# Altium PCB PCB2.PcbDoc
Units mm, origin at the board's own origin, x right, y up, seen from the top; angles counter-clockwise.
Board outline 14 x 14.04 mm, 2 copper layers (Top Layer, Bottom Layer); 20 components, 20 nets, 79 pads, 13 vias.
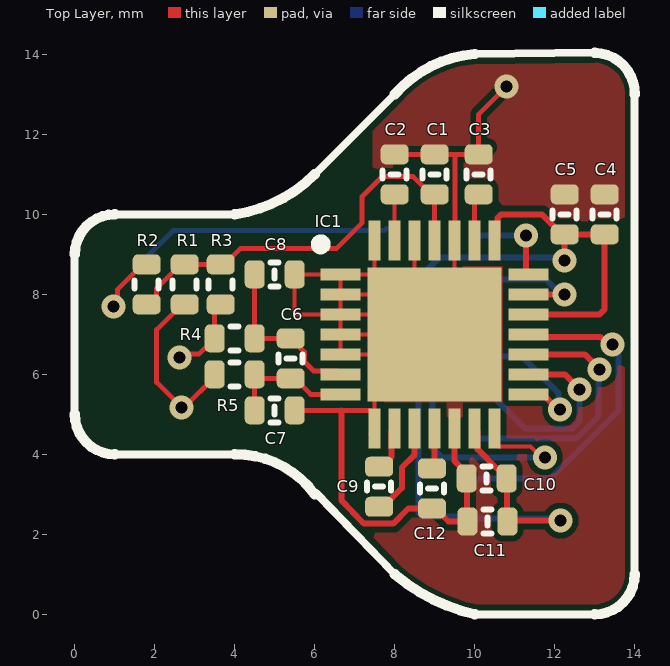
[diagram p0: Top Layer view]
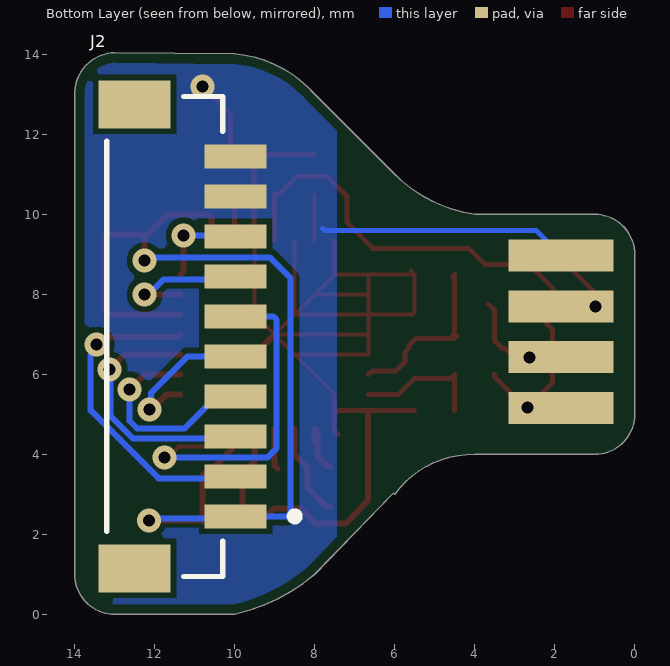
[diagram p1: Bottom Layer view, seen from below]

## Layer stack, top to bottom
Top Solder: solder mask 0.0102, Solder Resist, Dk 3.5
Top Layer: signal copper 0.0356
Dielectric 1: dielectric 0.32, FR-4, Dk 4.8
Bottom Layer: signal copper 0.0356
Bottom Solder: solder mask 0.0102, Solder Resist, Dk 3.5

## Board outline
1,4 cw(c1,5) 0,5 0,9 cw(c1,9) 1,10 4,10 ccw(c3.5,13.5) 6,11 8,13 cw(c10.241,11.047) 10,14.01 13,14.04 cw(c12.98,13.02) 14,13 14,1 cw(c13,1) 13,0 10,0 cw(c11.05,4.6) 8,1 6.034,3.033 6,3 ccw(c4.033,1.567) 4,4

## Design rules (kind name [scope] priority, off if disabled: settings)
AcuteAngle [All] p1: minimum=3.50000000000000E+0001 checktracksonly=FALSE
BoardOutlineClearance "BoardOutlineClearance 1" [All] p1: gap=0.25 ignorepadtopadclearanceinfootprint=FALSE except(0: Arc-SplitContinuation Track-SplitContinuation SMDPad-SplitContinuation THPad-SplitContinuation Via-SplitContinuation Fill-SplitContinuation Poly-SplitContinuation Region-SplitContinuation Text-SplitContinuation) // Milling
BoardOutlineClearance "BoardOutlineClearance 2" [All] p2: gap=0.4 ignorepadtopadclearanceinfootprint=FALSE except(0: Arc-SplitContinuation Track-SplitContinuation SMDPad-SplitContinuation THPad-SplitContinuation Via-SplitContinuation Fill-SplitContinuation Poly-SplitContinuation Region-SplitContinuation Text-SplitContinuation) // V-Cut
Clearance "Clearance-2 1/2 Oz" [All] p1: gap=0.1 ignorepadtopadclearanceinfootprint=FALSE except(0.15: Arc-Fill Arc-Poly Track-Fill Track-Poly SMDPad-SMDPad SMDPad-Fill SMDPad-Poly THPad-Fill THPad-Poly Via-Fill Via-Poly Fill-Fill Fill-Poly Poly-Poly Poly-Region Poly-Text; 0.25: Arc-Hole Track-Hole SMDPad-Hole THPad-Hole Via-Hole Fill-Hole Poly-Hole Region-Hole Text-Hole) // Advance
Clearance "Clearance-1 1/2 Oz" [All] p2: gap=0.125 ignorepadtopadclearanceinfootprint=FALSE except(0.2: Arc-Fill Arc-Poly Track-Fill Track-Poly SMDPad-SMDPad SMDPad-Fill SMDPad-Poly THPad-Fill THPad-Poly Via-Fill Via-Poly Fill-Fill Fill-Poly Poly-Poly Poly-Region Poly-Text; 0.25: Arc-Hole Track-Hole SMDPad-Hole THPad-Hole Via-Hole Fill-Hole Poly-Hole Region-Hole Text-Hole) // Standart
Clearance "Clearance 3 Oz" [All] p3: gap=0.35 ignorepadtopadclearanceinfootprint=FALSE except(0.25: Arc-Hole Track-Hole SMDPad-Hole THPad-Hole Via-Hole Fill-Hole Poly-Hole Region-Hole Text-Hole)
Clearance "Clearance 2 Oz" [All] p4: gap=0.3 ignorepadtopadclearanceinfootprint=FALSE except(0.25: Arc-Hole Track-Hole SMDPad-Hole THPad-Hole Via-Hole Fill-Hole Poly-Hole Region-Hole Text-Hole)
Clearance "Clearance-1 1 Oz" [All] p5: gap=0.2 ignorepadtopadclearanceinfootprint=FALSE except(0.25: Arc-Hole Track-Hole SMDPad-Hole THPad-Hole Via-Hole Fill-Hole Poly-Hole Region-Hole Text-Hole) // Standart
Clearance "Clearance-2 1 Oz" [All] p6: gap=0.15 ignorepadtopadclearanceinfootprint=FALSE except(0.2: Arc-Fill Arc-Poly Track-Fill Track-Poly SMDPad-Fill SMDPad-Poly THPad-Fill THPad-Poly Via-Fill Via-Poly Fill-Fill Fill-Poly Poly-Poly; 0.25: Arc-Hole Track-Hole SMDPad-Hole THPad-Hole Via-Hole Fill-Hole Poly-Hole Region-Hole Text-Hole) // Advance
ComponentClearance [All] p1: gap=0.15 collisioncheckmode=3 verticalgap=0.254 showdistances=FALSE
DiffPairsRouting "DiffPairsRouting 1 Oz" [All] p1: maxlimit=0.254 minlimit=0.2 mostfreqgap=0.254 toplayer_minwidth=0.1 toplayer_maxwidth=0.381 toplayer_prefwidth=0.381 bottomlayer_minwidth=0.1 bottomlayer_maxwidth=0.381 bottomlayer_prefwidth=0.381 maxuncoupledlength=12.7
DiffPairsRouting "DiffPairsRouting 1/2 Oz" [All] p2: maxlimit=0.254 minlimit=0.1 mostfreqgap=0.254 toplayer_minwidth=0.1 toplayer_maxwidth=0.381 toplayer_prefwidth=0.381 bottomlayer_minwidth=0.1 bottomlayer_maxwidth=0.381 bottomlayer_prefwidth=0.381 maxuncoupledlength=12.7
HoleSize "Minimum HoleSize" [IsPad] p1: absolutevalues=TRUE maxlimit=5.9 minlimit=0.6 maxpercent=80.000 minpercent=20.000
HoleSize "Minimum HoleSize VIA 1" [IsVia] p2: absolutevalues=TRUE maxlimit=5.9 minlimit=0.3 maxpercent=80.000 minpercent=20.000 // Standart
HoleSize "Minimum HoleSize VIA 2" [IsVia] p3: absolutevalues=TRUE maxlimit=5.9 minlimit=0.2 maxpercent=80.000 minpercent=20.000 // Advance
HoleToHoleClearance Hole2HoleClearance [All] p1: gap=0.25 allowstackedmicrovias=FALSE
MinimumAnnularRing "Minimum AR VIA Standart" [IsVia] p1: minimumring=0.15
MinimumAnnularRing "Minimum AR PAD Standart" [IsPAD] p2: minimumring=0.2
MinimumAnnularRing "Minimum AR VIA Advance" [IsVia] p3: minimumring=0.1
MinimumAnnularRing "Minimum AR PAD Advance" [IsPAD] p4: minimumring=0.15
MinimumSolderMaskSliver "SolderMask Bridge Standart" [All] p1: minsoldermaskwidth=0.15 // All Masks
MinimumSolderMaskSliver "SolderMask Bridge Advance" [All] p2: minsoldermaskwidth=0.1 // Mask LDI
PlaneClearance "PlaneClearance 3 Oz" [All] p1: clearance=0.35
PlaneClearance "PlaneClearance 2 Oz" [All] p2: clearance=0.3
PlaneClearance "PlaneClearance 1 Oz" [All] p3: clearance=0.2
PlaneClearance "PlaneClearance-1 1/2 Oz" [All] p4: clearance=0.2 // Standart
PlaneClearance "PlaneClearance-2 1/2 Oz" [All] p5: clearance=0.15 // Advance
PlaneConnect "TermalConnect-1 1 Oz" [All] p1: planeconnectstyle=Direct reliefexpansion=0.2 reliefentries=4 reliefconductorwidth=0.2 reliefairgap=0.2 // Standart
PlaneConnect "TermalConnect-2 1/2 Oz" [All] p2: planeconnectstyle=Direct reliefexpansion=0.15 reliefentries=4 reliefconductorwidth=0.15 reliefairgap=0.15 // Advance
PlaneConnect "TermalConnect 3 Oz" [All] p3: planeconnectstyle=Relief reliefexpansion=0.2 reliefentries=4 reliefconductorwidth=0.35 reliefairgap=0.35 // Standart
PlaneConnect "TermalConnect 2 Oz" [All] p4: planeconnectstyle=Relief reliefexpansion=0.2 reliefentries=4 reliefconductorwidth=0.3 reliefairgap=0.3 // Standart
PlaneConnect "TermalConnect-2 1 Oz" [All] p5: pad.planeconnectstyle=Relief pad.reliefexpansion=0.15 pad.reliefentries=4 pad.reliefconductorwidth=0.2 pad.reliefairgap=0.2 via.planeconnectstyle=Direct via.reliefexpansion=0.15 via.reliefentries=4 via.reliefconductorwidth=0.15 via.reliefairgap=0.15 // Advance
PlaneConnect "TermalConnect-1 1/2 Oz" [All] p6: planeconnectstyle=Relief reliefexpansion=0.2 reliefentries=4 reliefconductorwidth=0.2 reliefairgap=0.2 // Standart
PolygonConnect "PolygonConnect 3 Oz" [All] p1: connectstyle=Direct reliefconductorwidth=0.35 reliefentries=4 polygonreliefangle="90 Angle" airgapwidth=0.35
PolygonConnect "PolygonConnect 2 Oz" [All] p2: thpad.connectstyle=Relief thpad.reliefconductorwidth=0.3 thpad.reliefentries=4 thpad.polygonreliefangle="90 Angle" thpad.airgapwidth=0.3 smdpad.connectstyle=Relief smdpad.reliefconductorwidth=0.3 smdpad.reliefentries=4 smdpad.polygonreliefangle="90 Angle" smdpad.airgapwidth=0.3 via.connectstyle=Direct via.reliefconductorwidth=0.254 via.reliefentries=4 via.polygonreliefangle="90 Angle" via.airgapwidth=0.254
PolygonConnect "PolygonConnect-1 1 Oz" [All] p3: thpad.connectstyle=Relief thpad.reliefconductorwidth=0.2 thpad.reliefentries=4 thpad.polygonreliefangle="90 Angle" thpad.airgapwidth=0.2 smdpad.connectstyle=Relief smdpad.reliefconductorwidth=0.2 smdpad.reliefentries=4 smdpad.polygonreliefangle="90 Angle" smdpad.airgapwidth=0.2 via.connectstyle=Direct via.reliefconductorwidth=0.254 via.reliefentries=4 via.polygonreliefangle="90 Angle" via.airgapwidth=0.254 // Standart
PolygonConnect "PolygonConnect-2 1 Oz" [All] p4: thpad.connectstyle=Relief thpad.reliefconductorwidth=0.15 thpad.reliefentries=4 thpad.polygonreliefangle="90 Angle" thpad.airgapwidth=0.15 smdpad.connectstyle=Relief smdpad.reliefconductorwidth=0.15 smdpad.reliefentries=4 smdpad.polygonreliefangle="90 Angle" smdpad.airgapwidth=0.15 via.connectstyle=Direct via.reliefconductorwidth=0.254 via.reliefentries=4 via.polygonreliefangle="90 Angle" via.airgapwidth=0.254 // Advance
PolygonConnect "PolygonConnect-1 1/2 Oz" [All] p5: thpad.connectstyle=Relief thpad.reliefconductorwidth=0.15 thpad.reliefentries=4 thpad.polygonreliefangle="90 Angle" thpad.airgapwidth=0.2 smdpad.connectstyle=Relief smdpad.reliefconductorwidth=0.2 smdpad.reliefentries=4 smdpad.polygonreliefangle="90 Angle" smdpad.airgapwidth=0.2 via.connectstyle=Direct via.reliefconductorwidth=0.254 via.reliefentries=4 via.polygonreliefangle="90 Angle" via.airgapwidth=0.254 // Standart
PolygonConnect "PolygonConnect-2 1/2 Oz" [All] p6: thpad.connectstyle=Relief thpad.reliefconductorwidth=0.125 thpad.reliefentries=4 thpad.polygonreliefangle="90 Angle" thpad.airgapwidth=0.15 smdpad.connectstyle=Relief smdpad.reliefconductorwidth=0.125 smdpad.reliefentries=4 smdpad.polygonreliefangle="90 Angle" smdpad.airgapwidth=0.15 via.connectstyle=Direct via.reliefconductorwidth=0.254 via.reliefentries=4 via.polygonreliefangle="90 Angle" via.airgapwidth=0.254 // Advance
RoutingCorners [All] p1 off: cornerstyle=45-Degree minsetback=2.54 maxsetback=2.54
RoutingVias [All] p1: holewidth=0.3 width=0.6 viastyle="Through Hole" minholewidth=0.2 minwidth=0.4 maxholewidth=5.9 maxwidth=6.4
SilkToSilkClearance Silk2SilkClearance [All] p1 off: silktosilkclearance=0.15
SilkToSolderMaskClearance Silk2SolderMaskClearance [IsPad] p1 off: minsilkscreentomaskgap=0.15 clearancetoexposedcopper=TRUE
SolderMaskExpansion SolderMaskExpansion-1 [All] p1: expansion=0.05 istentingtop=FALSE // Standart
SolderMaskExpansion "SolderMaskExpansion LDI" [All] p2: expansion=0.025 istentingtop=FALSE // Advance
UnRoutedNet [All] p1: checkbadconnections=TRUE
Width "Width 1/2 Oz" [All] p1: maxlimit=10 minlimit=0.1 preferedwidth=0.125 checkconnectedcopper=TRUE
Width "Width 3 Oz" [All] p2: maxlimit=10 minlimit=0.35 preferedwidth=0.4 checkconnectedcopper=TRUE
Width "Width 2 Oz" [All] p3: maxlimit=10 minlimit=0.3 preferedwidth=0.35 minimp=50.000000 maximp=50.000000 favimp=50.000000 checkconnectedcopper=TRUE
Width "Width 1 Oz" [All] p4: maxlimit=10 minlimit=0.15 preferedwidth=0.2 checkconnectedcopper=TRUE
19 further rules are at their usual default settings.

## Components (designator, comment, footprint, x,y, rotation, side; value= is the part's Value field where it differs from the comment)
C1 "10мкФ" C0402C 9,11 r90 top value=0,01
C2 "1мкФ" C0402C 8,11 r90 top value=0,01
C3 "10мкФ" C0402C 10.1,11 r90 top value=0,01
C4 "10мкФ" C0402C 13.25,10 r90 top value=0,01
C5 "100нФ" C0402C 12.25,10 r90 top value=0,01
C6 "1нФ" C0402C 5.4,6.4 r270 top value=0,01
C7 "10пФ" C0402C 5,5.1 r180 top value=0,01
C8 "10пФ" C0402C 5,8.5 r180 top value=0,01
C9 "1мкФ" C0402C 7.61,3.19 r90 top value=0,01
C10 "10мкФ" C0402C 10.3,3.4 r180 top value=0,01
C11 "100нФ" C0402C 10.32,2.32 r180 top value=0,01
C12 "1нФ" C0402C 8.93,3.15 r270 top value=0,01
IC1 "MAX30003CTI+" QFN50P500X500X80-29N 9,7 r0 top locked
J1 "M50-3600342" HARWIN_M50-3600342 -0.1,7.7 r270 bottom
J2 "BM10B-SRSS-TB(LF)(SN)" JST_BM10B-SRSS-TB(LF)(SN) 12.5,6.95 r90 bottom locked
R1 "500к" C0402R 2.75,8.25 r270 top value=0R
R2 "0R" C0402R 1.8,8.25 r270 top
R3 "500к" C0402R 3.65,8.25 r270 top value=0R
R4 "1к" C0402R 4,6.9 r180 top value=0R
R5 "1к" C0402R 4,6 r180 top value=0R

## Footprints (in the part's own frame and the unit in brackets; to place one, negate y for a bottom-side part, rotate by r counter-clockwise, add the part's x,y. Pads: shape width x height; smd on the part's side, far side on the other; paste and mask are expansions set on the pad)
C0402C [mm]
  rrect50% 0.5x0.7 smd: 1(-0.5,0) 2(0.5,0)
  silkscreen extent -0.1,-0.3 0.1,0.3, body extent -0.5,-0.28 0.5,0.28, height 0.5
C0402R [mm]
  rrect50% 0.5x0.7 smd: 1(-0.5,0) 2(0.5,0)
  silkscreen extent -0.1,-0.3 0.1,0.3, body extent -0.5,-0.28 0.5,0.28, height 0.5
HARWIN_M50-3600342 [mm]
  rect 0.8x2.62 smd: 1(-1.27,-1.94) 2(0,-1.94) 3(1.27,-1.94) 4(2.54,-1.94)
JST_BM10B-SRSS-TB(LF)(SN) [mm]
  rect 0.6x1.55 smd: 1(-4.5,-2.525) 2(-3.5,-2.525) 3(-2.5,-2.525) 4(-1.5,-2.525) 5(-0.5,-2.525) 6(0.5,-2.525) 7(1.5,-2.525) 8(2.5,-2.525) 9(3.5,-2.525) 10(4.5,-2.525)
  rect 1.2x1.8 smd: S1(-5.8,0) S2(5.8,0)
  silkscreen extent -6,-4.1 6,0.7
QFN50P500X500X80-29N [mm]
  rect 1x0.3 smd: 1(-2.35,1.5) 2(-2.35,1) 3(-2.35,0.5) 4(-2.35,0) 5(-2.35,-0.5) 6(-2.35,-1) 7(-2.35,-1.5) 15(2.35,-1.5) 16(2.35,-1) 17(2.35,-0.5) 18(2.35,0) 19(2.35,0.5) 20(2.35,1) 21(2.35,1.5)
  rect 0.3x1 smd: 8(-1.5,-2.35) 9(-1,-2.35) 10(-0.5,-2.35) 11(0,-2.35) 12(0.5,-2.35) 13(1,-2.35) 14(1.5,-2.35) 22(1.5,2.35) 23(1,2.35) 24(0.5,2.35) 25(0,2.35) 26(-0.5,2.35) 27(-1,2.35) 28(-1.5,2.35)
  rect 3.35x3.35 smd: 29(0,0)
  silkscreen extent -2.97,2.13 -2.72,2.37, body extent -2.55,-2.55 2.55,2.55, height 0.8

## Part data
C1 C2 C3 C4 C5 C6 C7 C8 C9 C10 C11 C12: library part CC0402JRX7R9BB103, "CC0402JRX7R9BB103, 0402 X5R 0,01 uF 50V", Dielectric=X5R, Manufacturer=Yageo, Package="SMD 0402", Tolerance=±10%, Voltage=50V, Component Note="0402 0,01uF ±10% 50V X5R", ComponentLink1Description=Datasheet, Part Number=CC0402JRX7R9BB103, Tmax=125, Tmin=-55, Units=uF
IC1: "Integrated Circuit", Manufacturer_Name="Analog Devices", Mouser Part Number=700-MAX30003CTI+, Arrow Part Number=MAX30003CTI+, Arrow Price/Stock=https://www.arrow.com/en/products/max30003cti/maxim-integrated?region=nac, Datasheet Link=https://datasheets.maximintegrated.com/en/ds/MAX30003.pdf, Height=0.8mm, Manufacturer_Part_Number=MAX30003CTI+, Mouser Price/Stock=https://www.mouser.co.uk/ProductDetail/Analog-Devices-Maxim-Integrated/MAX30003CTI%2b?qs=rUyhvjvpWj%2FiU0gYUPHOFw%3D%3D
J1: Package=None, Availability=Unavailable, MP=M50-3600342, Price=None
J2: "Connector Header Surface Mount 10 position 0.039 (1.00mm)", Package=None, Availability="In Stock", Check_prices=https://www.snapeda.com/parts/BM10B-SRSS-TB(LF)(SN)/JST+Sales+America+Inc./view-part/?ref=eda, MF="JST Sales", MP=BM10B-SRSS-TB(LF)(SN), Price=None, SnapEDA_Link=https://www.snapeda.com/parts/BM10B-SRSS-TB(LF)(SN)/JST+Sales+America+Inc./view-part/?ref=snap
R1 R2 R3 R4 R5: library part Р1-12М-0402-0, "Р1-12М-0402-0,  SMD 0402", Manufacturer="НПО ЭРКОН", Package="SMD 0402", Component Note="0402 0R", Part Number=Р1-12М-0402-0, TU="АБШК.434110.023 ТУ", TYPE=Р1-12М

## Via types
v1: diameter 0.6, hole 0.3, Top Layer to Bottom Layer, tented both sides, 13 vias

## Nets (pads, with @x,y where several pads share a name; then routed paths per layer and width w, separated by ;. In a path a pad name is that pad's centre, name@x,y a point inside that pad or via, vN(x,y) a via of type N, cw(c..) or ccw(c..) an arc to the next point about the centre after c; other vN are vias at no path point)
1.8V: C4.1 C5.1 C10.1 C11.1 IC1.13 IC1.19 IC1.22 J2.1 | length 25.4
  Top Layer w0.15: IC1.13 10.075,4.575 10.075,4.125 10.556,3.644 10.629,3.644 10.8,3.473 C10.1 10.81,3.39 10.81,2.33 C11.1 10.845,2.345 v1(12.145,2.345) ; IC1.22 10.575,9.425 10.575,9.912 10.663,10 11.677,10 12.177,9.5 C5.1 ; IC1.19 13.125,7.5 13.25,7.625 C4.1 C5.1 ; v1(12.25,8.85) C5.1
  Bottom Layer w0.15: v1(12.145,2.345) 12.09,2.4 10.025,2.4 J2.1 8.688,2.45 8.6,2.538 8.6,8.397 9.128,8.925 12.175,8.925 v1(12.25,8.85)
AGND: C1.2 C2.2 C3.2 C4.2 C5.2 C7.1 C8.1 C10.2 C11.2 C12.2 IC1.1 IC1.2 IC1.3 IC1.4 IC1.5 IC1.8 IC1.12 IC1.24 IC1.26 IC1.28 IC1.29 J1.1 J2.9 J2.10 | length 48.7
  Top Layer w0.1: C8.1@5.591,8.591 C8.1 ; IC1.3@6.616,7.466 IC1.3 ; IC1.8 7.5,5 7.5,5.5 IC1.29@8.5,6.5 ; IC1.28 IC1.29@7.5,8.5 ; IC1.26 IC1.29@8.5,7.5 ; IC1.24 9.5,7.5 IC1.29 ; C11.2@9.695,2.445 9.81,2.33 C11.2 ; C8.1 5.5,7.559 5.559,7.5 IC1.3 ; C8.1 IC1.1 ; IC1.4 IC1.3 ; IC1.4 IC1.29 ; IC1.4 IC1.5 IC1.29@8.5,6.5 ; IC1.3 IC1.29@8.5,7.5 ; IC1.3 IC1.2 ; IC1.2 IC1.29@8,8 ; IC1.2 IC1.1 ; IC1.1 IC1.29@7.5,8.5 ; IC1.29@7.5,8.5 IC1.29@8,8 ; IC1.29@8,8 IC1.29@8.5,7.5 ; IC1.29@8.5,6.5 IC1.29 ; IC1.29@8.5,7.5 IC1.29
  Top Layer w0.125: C7.1 6.67,5.1 7.4,5.1 IC1.8@7.5,5 ; IC1.8@7.413,4.5 7.5,4.587 IC1.8 ; C2.2 C1.2 9.513,11.5 ; IC1.24 9.513,9.363 9.513,11.5 ; C11.2@9.695,2.445 9.81,2.33 C11.2 ; C3.2@10.349,11.683 10.166,11.5 C3.2 ; v1(10.8,13.2) 10.1,12.5 C3.2 ; 9.513,11.5 C3.2
  Top Layer w0.15: 6.67,5.1 6.67,2.843 7.185,2.31 ; 7.186,2.309 7.23,2.265 7.959,2.265 8.344,2.65 C12.2 9.015,2.65 9.345,2.32 C11.2 ; IC1.29 IC1.29@9.5,6.5 ; IC1.12@9.438,4.588 IC1.12 9.5,3.827 9.862,3.465 9.862,3.463 C10.2 9.81,3.39 C11.2@9.81,2.33
  Bottom Layer w0.1: J2.10 J2.10@10.025,11.5
  Bottom Layer w0.125: J1.1 2.47,9.6 7.75,9.6 7.8,9.65
CLK: IC1.16 J2.4 | length 5.3
  Top Layer w0.15: IC1.16 12.25,6 v1(12.625,5.625)
  Bottom Layer w0.15: J2.4 10.45,5.45 11.25,4.65 12.443,4.65 12.625,4.832 v1(12.625,5.625)
CS: IC1.15 J2.5 | length 3.9
  Top Layer w0.15: IC1.15 11.7,5.5 12.075,5.125 v1(12.135,5.125)
  Bottom Layer w0.15: J2.5 11.175,6.45 12.096,5.529 12.096,5.164 v1(12.135,5.125)
FCLK: IC1.14 J2.6 | length 8.9
  Top Layer w0.1: IC1.14 10.5,4.3 10.6,4.2 11.392,4.2 11.667,3.925 v1(11.753,3.925)
  Bottom Layer w0.15: J2.6 9.038,7.45 8.95,7.362 8.95,4.153 9.178,3.925 v1(11.753,3.925)
INT2B: IC1.20 J2.7 | length 3.4
  Top Layer w0.15: IC1.20 v1(12.25,8)
  Bottom Layer w0.15: J2.7@10.025,8.5 J2.7 10.05,8.375 11.776,8.375 12.151,8 v1(12.25,8)
INTB: IC1.21 J2.8 | length 2.3
  Top Layer w0.15: v1(11.277,9.473) 11.277,8.573 IC1.21
  Bottom Layer w0.15: J2.8 9.998,9.473 v1(11.277,9.473)
MISO: IC1.18 J2.2 | length 8.3
  Top Layer w0.15: IC1.18 11.413,6.938 13.137,6.938 13.33,6.745 v1(13.45,6.745)
  Bottom Layer w0.15: J2.2 10.025,3.4 11.9,3.4 13.6,5.1 13.6,6.473 13.45,6.623 v1(13.45,6.745)
MOSI: IC1.17 J2.3 | length 6.5
  Top Layer w0.15: IC1.17 12.746,6.5 13.121,6.125 v1(13.125,6.125)
  Bottom Layer w0.15: J2.3 10.025,4.4 12.546,4.4 13.1,4.954 13.1,6.1 v1(13.125,6.125)
N: J1.4 R1.2 R5.2 | length 4.4
  Top Layer w0.125: R1.2 2.684,7.75 2.05,7.116 2.05,5.8 v1(2.675,5.175) 2.741,5.175 3.5,5.934 R5.2
NetC2_1: C2.1 IC1.27 | length 1.2
  Top Layer w0.1: IC1.27 C2.1
NetC3_1: C3.1 IC1.23 | length 1.2
  Top Layer w0.125: IC1.23 10,10.4 C3.1
NetC6_1: C6.1 C8.2 IC1.6 R4.1 | length 4.6
  Top Layer w0.1: R4.1 R4.1@4.565,6.965 ; C8.2 C8.2@4.563,8.438
  Top Layer w0.125: R4.1@4.437,6.962 R4.1 ; C8.2 R4.1 ; IC1.6 6.563,6.087 5.969,6.087 5.744,6.313 5.744,6.556 5.649,6.651 5.649,6.717 5.466,6.9 C6.1 R4.1
NetC6_2: C6.2 C7.2 IC1.7 R5.1 | length 3.3
  Top Layer w0.125: C7.2 R5.1 4.6,5.9 C6.2 5.5,5.9 5.9,5.5 IC1.7
NetC9_1: C9.1 IC1.10 | length 2.4
  Top Layer w0.15: C9.1 7.71,2.69 8.177,3.157 8.177,3.671 8.5,3.994 IC1.10
NetC9_2: C9.2 IC1.9 | length 1.8
  Top Layer w0.15: C9.2 C9.2@7.664,3.69 ; C9.2@7.835,3.861 C9.2@7.664,3.69 ; IC1.9@8,4.3 IC1.9 7.925,4.575 7.925,3.932 7.683,3.69 C9.2@7.664,3.69
NetC12_1: C12.1 IC1.11 | length 1
  Top Layer w0.15: C12.1 9,3.72 IC1.11
NetJ1_2: J1.2 R2.1 | length 1.5
  Top Layer w0.125: v1(0.975,7.7) 1.066,7.791 1.066,8.116 1.7,8.75 R2.1
P: J1.3 R3.2 R4.2 | length 2
  Top Layer w0.125: v1(2.625,6.425) 2.712,6.512 3.113,6.512 3.251,6.651 3.317,6.651 3.5,6.834 R4.2 3.5,7.6 R3.2
Vcm: C1.1 IC1.25 R1.1 R2.2 R3.1 | length 10.4
  Top Layer w0.125: R2.2 1.866,7.75 2.049,7.933 2.049,8.149 2.65,8.75 R1.1 R3.1 3.748,8.75 4.148,9.15 6.55,9.15 7.188,9.788 7.188,10.444 7.692,10.948 8.452,10.948 8.9,10.5 C1.1 IC1.25
pads on no net: J2.S1 J2.S2

## Polygon pours and split planes (outlines as drawn)
AGND on Bottom Layer "NONET_L-01_P-001" (solid, remove dead copper, pour order 1): 14,0 14,14 9,14 7.45,12.45 7.45,1.55 5.039,4 9.039,0
AGND on Top Layer "NONET_L-01_P-001" (solid, remove dead copper, pour order 0): 7.45,1.55 9.078,0 14,0 14,14 9,14 7.45,12.45

## Silkscreen, mask and mechanical layers (free items; w line width, h text height)
Top Overlay:
  lines w0.2: 0,5 0,9 ; 1,4 4,4 ; 1,10 4,10 ; 6,11 8,13 ; 6.034,3.033 8,1 ; 10,0 13,0 ; 10,14.01 13,14.04 ; 14,1 14,13
  lines w0.254: 0,5 ccw(c1,5) 1,4 ; 0,9 cw(c1,9) 1,10 ; 4,4 cw(c4.033,1.567) 6,3 ; 4,10 ccw(c3.5,13.5) 6,11 ; 8,1 ccw(c11.05,4.6) 10,0 ; 8,13 cw(c10.241,11.047) 10,14.01 ; 13,0 ccw(c13,1) 14,1 ; 13,14.04 cw(c12.98,13.02) 14,13